# Altium PCB PCB1.PcbDoc (part 3 of 4)
Units mil, origin at the board's own origin, x right, y up, seen from the top; angles counter-clockwise.
Board outline 1280 x 1960 mil, 2 copper layers (Top Layer, Bottom Layer); 39 components, 61 nets, 283 pads, 76 vias.
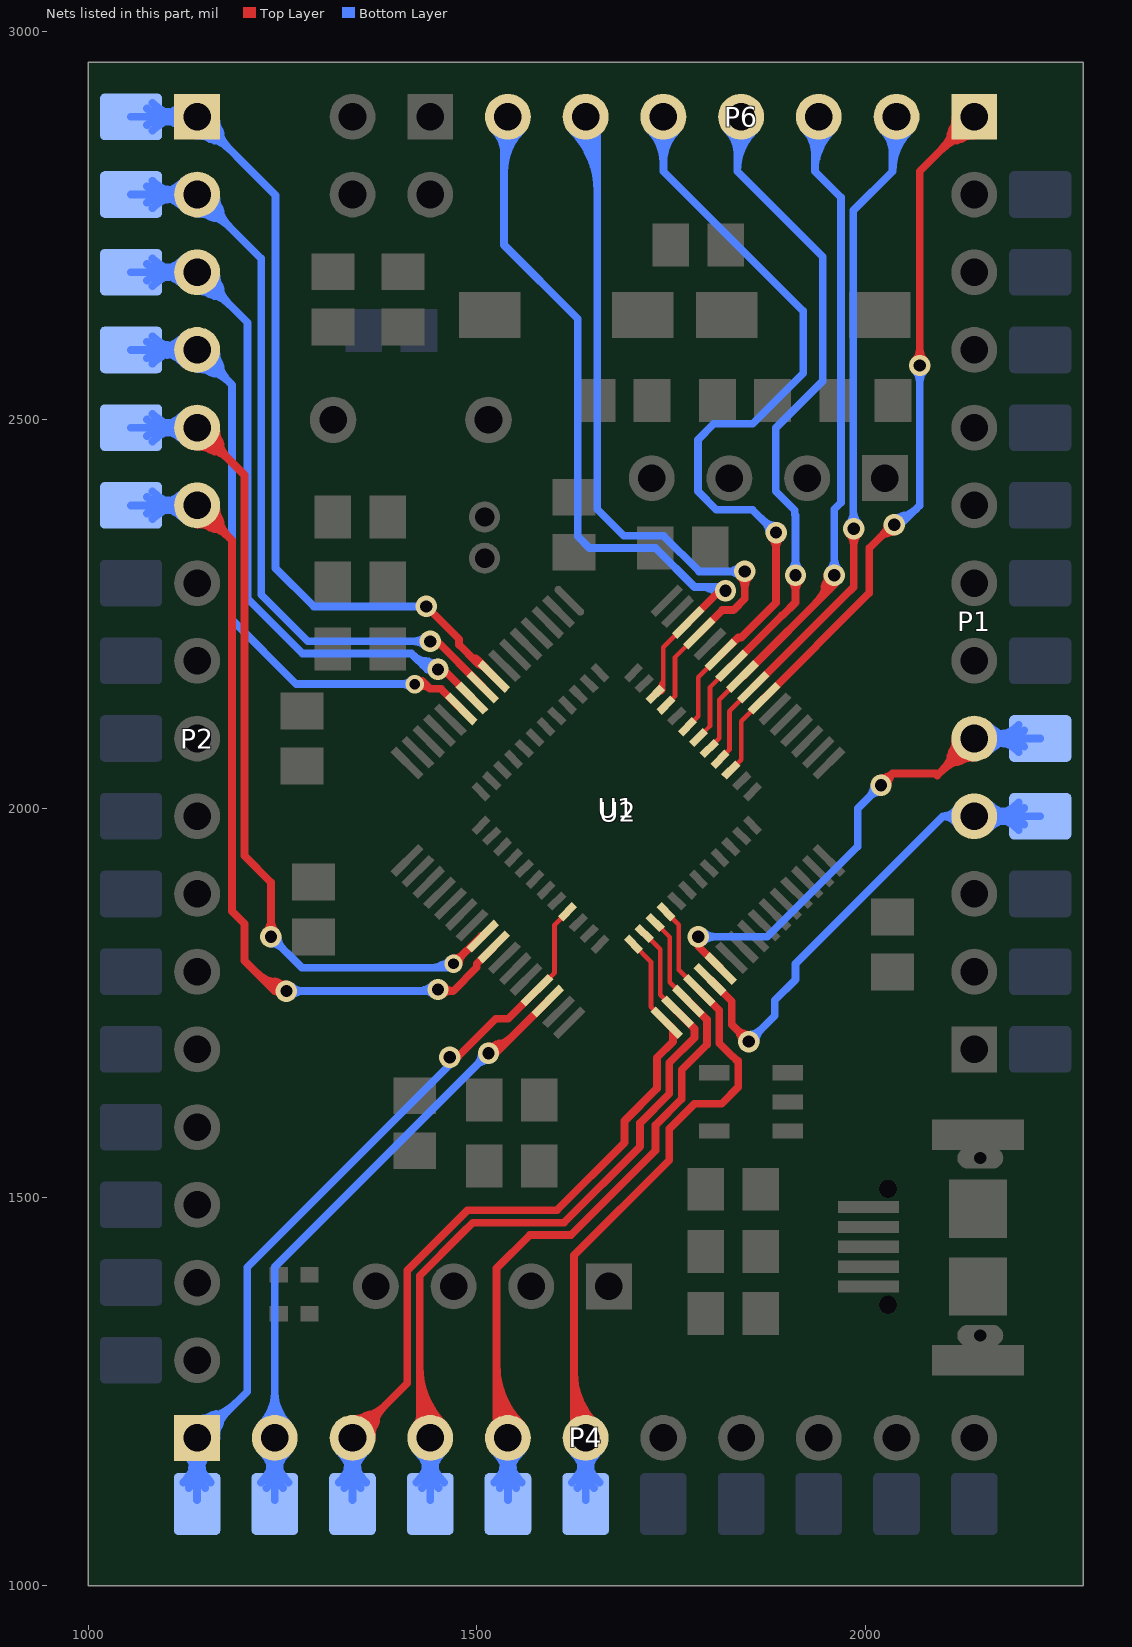
[diagram p3: the nets of this part, all layers, seen from the top]

## Via types
v1: diameter 27.56, hole 15.75, Top Layer to Bottom Layer, tented both sides, 72 vias
v2: diameter 23.62, hole 13.78, Top Layer to Bottom Layer, tented both sides, 4 vias

## Nets (pads, with @x,y where several pads share a name; then routed paths per layer and width w, separated by ;. In a path a pad name is that pad's centre, name@x,y a point inside that pad or via, vN(x,y) a via of type N, cw(c..) or ccw(c..) an arc to the next point about the centre after c; other vN are vias at no path point) (continued)
PB3: P6.1 U1.39 U2.55 | length 1661.6
  Top Layer w6: U1.39@1826.85,2049.41 1840,2062.56 1840,2112.37 U2.55@1869.59,2141.96
  Top Layer w10: U2.55@1869.59,2141.96 2005,2277.37 2005,2335 v1@2035,2365 ; 2026.83,2353.5 ccw(c2022.66,2369.08) v1@2038.17,2364.67 ; v1(2070,2570) 2070,2820 P6.1@2140,2890 ; 2109.48,2867.65 cw(c2146.61,2857.7) P6.1@2138.9,2895.36 ; 2117.65,2859.48 ccw(c2107.7,2896.61) P6.1@2145.36,2888.9 ; 2070,2591.2 cw(c2048.8,2591.2) 2063.79,2576.21 ccw(c2048.8,2591.2) 2070,2591.2 ; 2070,2591.2 ccw(c2091.2,2591.2) 2076.21,2576.21 cw(c2091.2,2591.2) 2070,2591.2 ; 2098.13,2848.13 cw(c2140,2806.26) 2140,2865.47 ccw(c2140,2806.26) 2098.13,2848.13 ; 2098.13,2848.13 ccw(c2056.26,2890) 2115.47,2890 cw(c2056.26,2890) 2098.13,2848.13 ; P6.1@2115.2,2865.2 cw(c2140,2840.4) 2140,2875.47 ccw(c2140,2840.4) P6.1@2115.2,2865.2 ; P6.1@2115.2,2865.2 ccw(c2090.4,2890) 2125.47,2890 cw(c2090.4,2890) P6.1@2115.2,2865.2 ; 2018.6,2348.6 cw(c2037,2330.2) 2037,2356.22 ccw(c2037,2330.2) 2018.6,2348.6 ; 2023.43,2353.43 ccw(c2011.85,2365) 2028.22,2365 cw(c2011.85,2365) 2023.43,2353.43
  Bottom Layer w10: v1@2035,2365 2045,2365 2070,2390 v1(2070,2570) v1@2070,2575 ; v1@2035.9,2365.54 cw(c2056.01,2355.7) 2050.21,2377.32 ; 2070,2548.8 cw(c2091.2,2548.8) 2076.21,2563.79 ccw(c2091.2,2548.8) 2070,2548.8 ; 2070,2548.8 ccw(c2048.8,2548.8) 2063.79,2563.79 cw(c2048.8,2548.8) 2070,2548.8 ; v1@2037,2373.78 ccw(c2037,2414.29) 2065.64,2385.64 cw(c2037,2414.29) v1@2037,2373.78
  other v1: 2037,2365
PB4: P6.2 U1.40 U2.56 | length 1311.1
  Top Layer w6: U1.40@1812.93,2063.33 1825,2075.4 1825,2125.21 U2.56@1855.67,2155.88
  Top Layer w10: U2.56@1855.67,2155.88 1980,2280.21 1980.21,2280.21 1985,2285 v1(1985,2360) ; 1985,2338.8 cw(c2006.2,2338.8) 1991.21,2353.79 ccw(c2006.2,2338.8) 1985,2338.8 ; 1985,2338.8 ccw(c1963.8,2338.8) 1978.79,2353.79 cw(c1963.8,2338.8) 1985,2338.8
  Bottom Layer w10: v1(1985,2360) 1984.47,2360.53 1984.47,2769.47 2035,2820 P6.2@2035,2885 ; v1@1978.79,2366.21 ccw(c1965.08,2379.92) 1984.47,2379.92 cw(c1965.08,2379.92) v1@1978.79,2366.21 ; 1984.47,2382.47 ccw(c2007.47,2382.47) 1991.21,2366.21 cw(c2007.47,2382.47) 1984.47,2382.47 ; P6.2@2022.66,2872.66 cw(c1992.86,2842.86) 2035,2842.86 ccw(c1992.86,2842.86) P6.2@2022.66,2872.66 ; 2035,2819.83 cw(c2108.62,2819.83) 2057.15,2872.46 ccw(c2108.62,2819.83) 2035,2819.83 ; 2035,2843.59 cw(c2085.38,2843.59) 2050.16,2879.61 ccw(c2085.38,2843.59) 2035,2843.59
PB5: P6.3 U1.41 U2.57 | length 1359.7
  Top Layer w6: U1.41@1799.01,2077.25 1812,2090.24 1812,2140.05 U2.57@1841.75,2169.8
  Top Layer w10: U2.57@1841.75,2169.8 v1@1961.95,2290 ; 1947.27,2285.27 cw(c1972.39,2278.53) v1@1959.39,2301.06 ; 1936.56,2264.62 ccw(c1901.18,2300) 1951.22,2300 cw(c1901.18,2300) 1936.56,2264.62 ; 1953.64,2281.69 ccw(c1935.32,2300) 1961.22,2300 cw(c1935.32,2300) 1953.64,2281.69
  Bottom Layer w10: P6.3@1940,2890 1935,2885 1935,2820 1968.47,2786.53 1968.47,2393.47 1960,2385 v1(1960,2300) ; 1960,2321.2 cw(c1938.8,2321.2) 1953.79,2306.21 ccw(c1938.8,2321.2) 1960,2321.2 ; 1960,2321.2 ccw(c1981.2,2321.2) 1966.21,2306.21 cw(c1981.2,2321.2) 1960,2321.2 ; P6.3@1922.66,2872.66 cw(c1892.86,2842.86) 1935,2842.86 ccw(c1892.86,2842.86) P6.3@1922.66,2872.66 ; 1935,2819.83 cw(c2008.62,2819.83) 1957.15,2872.46 ccw(c2008.62,2819.83) 1935,2819.83 ; 1935,2843.59 cw(c1985.38,2843.59) 1950.16,2879.61 ccw(c1985.38,2843.59) 1935,2843.59
PB6: P6.4 U1.42 U2.58 | length 1331.3
  Top Layer w6: U1.42@1785.09,2091.17 1800,2106.08 1800,2155.89 U2.58@1827.83,2183.72
  Top Layer w10: U2.58@1827.83,2183.72 1892.78,2248.67 1893.67,2248.67 1910,2265 v1(1910,2300) ; 1910,2278.8 cw(c1931.2,2278.8) 1916.21,2293.79 ccw(c1931.2,2278.8) 1910,2278.8 ; 1910,2278.8 ccw(c1888.8,2278.8) 1903.79,2293.79 cw(c1888.8,2278.8) 1910,2278.8
  Bottom Layer w10: P6.4@1840,2890 1835,2885 1835,2820 1945,2710 1945,2550 1884.47,2489.47 1884.47,2408.21 1909,2383.69 1909,2378.37 1910,2377.37 v1(1910,2300) ; 1910,2321.2 cw(c1888.8,2321.2) 1903.79,2306.21 ccw(c1888.8,2321.2) 1910,2321.2 ; 1910,2321.2 ccw(c1931.2,2321.2) 1916.21,2306.21 cw(c1931.2,2321.2) 1910,2321.2 ; P6.4@1822.66,2872.66 cw(c1792.86,2842.86) 1835,2842.86 ccw(c1792.86,2842.86) P6.4@1822.66,2872.66 ; 1835,2819.83 cw(c1908.62,2819.83) 1857.15,2872.46 ccw(c1908.62,2819.83) 1835,2819.83 ; 1835,2843.59 cw(c1885.38,2843.59) 1850.16,2879.61 ccw(c1885.38,2843.59) 1835,2843.59
PB7: P6.5 U1.43 U2.59 | length 1479.4
  Top Layer w6: U1.43@1771.17,2105.09 1785,2118.92 1785,2168.73 U2.59@1813.91,2197.64
  Top Layer w10: U2.59@1813.91,2197.64 1836.27,2220 1840.3,2220 1885,2264.7 v1(1885,2355) ; 1885,2333.8 cw(c1906.2,2333.8) 1891.21,2348.79 ccw(c1906.2,2333.8) 1885,2333.8 ; 1885,2333.8 ccw(c1863.8,2333.8) 1878.79,2348.79 cw(c1863.8,2333.8) 1885,2333.8
  Bottom Layer w10: P6.5@1740,2890 1740,2820 1920,2640 1920,2560 1855,2495 1805,2495 1784.47,2474.47 1784.47,2408.21 1808.21,2384.47 1854.57,2384.47 v1@1875,2364.04 ; 1740,2830.79 cw(c1799.21,2830.79) 1757.34,2872.66 ccw(c1799.21,2830.79) 1740,2830.79 ; 1740,2830.79 ccw(c1680.79,2830.79) 1722.66,2872.66 cw(c1680.79,2830.79) 1740,2830.79 ; 1740,2854.93 cw(c1775.07,2854.93) 1750.27,2879.73 ccw(c1775.07,2854.93) 1740,2854.93 ; 1740,2854.93 ccw(c1704.93,2854.93) 1729.73,2879.73 cw(c1704.93,2854.93) 1740,2854.93 ; 1868.38,2370.66 ccw(c1885,2387.28) 1885,2363.78 cw(c1885,2387.28) 1868.38,2370.66 ; 1870.69,2368.35 cw(c1857.33,2355) 1876.22,2355 ccw(c1857.33,2355) 1870.69,2368.35
PB8: P6.6 U1.45 U2.61 | length 1564.2
  Top Layer w6: U1.45@1743.33,2132.93 1755,2144.6 1755,2194.41 U2.61@1786.07,2225.48
  Top Layer w10: U2.61@1786.07,2225.48 1815.81,2255.22 1830.26,2255.22 1844.78,2269.74 v1(1844.78,2305) ; 1844.78,2283.8 cw(c1865.98,2283.8) 1850.99,2298.79 ccw(c1865.98,2283.8) 1844.78,2283.8 ; 1844.78,2283.8 ccw(c1823.58,2283.8) 1838.57,2298.79 cw(c1823.58,2283.8) 1844.78,2283.8
  Bottom Layer w10: P6.6@1640,2890 1655,2875 1655,2385 1689,2351 1740,2351 1786,2305 v1(1844.78,2305) ; P6.6@1642.72,2865.62 cw(c1643.73,2856.58) 1651.62,2861.13 cw(c1657.12,2864.3) P6.6@1653.6,2869.59 ; 1642.78,2857.12 cw(c1656.09,2864.8) P6.6@1647.82,2877.76 ; 1648.01,2848.06 cw(c1661.72,2855.98) P6.6@1653.2,2869.33 ; 1823.58,2305 cw(c1823.58,2283.8) 1838.57,2298.79 ccw(c1823.58,2283.8) 1823.58,2305 ; 1823.58,2305 ccw(c1823.58,2326.2) 1838.57,2311.21 cw(c1823.58,2326.2) 1823.58,2305 ; P6.6@1622.66,2872.66 cw(c1544.57,2794.57) 1655,2794.57 ccw(c1544.57,2794.57) P6.6@1622.66,2872.66 ; P6.6@1629.73,2879.73 cw(c1568.71,2818.71) 1655,2818.71 ccw(c1568.71,2818.71) P6.6@1629.73,2879.73 ; P6.6@1636.8,2886.8 cw(c1592.86,2842.86) 1655,2842.86 ccw(c1592.86,2842.86) P6.6@1636.8,2886.8
PB9: P6.7 U1.46 U2.62 | length 1357.6
  Top Layer w6: U1.46@1729.41,2146.85 1740,2157.44 1740,2207.25 U2.62@1772.15,2239.4 ; U1.46@1736.84,2152.92 cw(c1747.44,2155.76) 1737.93,2161.24 ; U1.46@1733.62,2153.78 ccw(c1718.23,2169.17) 1740,2169.17 cw(c1718.23,2169.17) U1.46@1733.62,2153.78 ; U1.46@1737.87,2149.53 ccw(c1732.71,2154.69) 1740,2154.69 cw(c1732.71,2154.69) U1.46@1737.87,2149.53
  Top Layer w10: U2.62@1772.15,2239.4 1812.75,2280 v1(1820,2280)
  Bottom Layer w10: P6.7@1540,2890 1535,2885 1535,2725.04 1629.78,2630.26 1629.78,2350.22 1645,2335 1730,2335 1780,2285 1815,2285 v1(1820,2280) ; 1535,2842.86 cw(c1587.14,2842.86) 1550.27,2879.73 ccw(c1587.14,2842.86) 1535,2842.86 ; 1535,2842.86 ccw(c1492.86,2842.86) 1522.66,2872.66 cw(c1492.86,2842.86) 1535,2842.86 ; 1535,2818.71 cw(c1611.29,2818.71) 1557.34,2872.66 ccw(c1611.29,2818.71) 1535,2818.71 ; 1786.73,2285 cw(c1786.73,2246.73) 1813.79,2273.79 ccw(c1786.73,2246.73) 1786.73,2285
PB10: P4.1 pad.1@1140,1105 U1.21 U2.29 | length 2257.9
  Top Layer w6: U2.29@1577.28,1766.14 1600,1788.86 1600,1850.4 U1.21@1616.67,1867.07
  Top Layer w10: v1@1475,1680.04 1524.28,1729.32 1540.46,1729.32 U2.29@1577.28,1766.14
  Bottom Layer w10: P4.1@1126.72,1169.38 cw(c1117.93,1155.72) 1133.61,1151.52 cw(c1155.04,1145.78) P4.1@1147.9,1166.78 ; P4.1@1132.1,1166.78 cw(c1124.96,1145.78) 1146.39,1151.52 cw(c1162.07,1155.72) P4.1@1153.28,1169.38 ; P4.1@1134.73,1191.46 cw(c1175.6,1180.16) 1164.63,1221.13 ; pad.1@1140,1110 P4.1@1140,1190 ; P4.1@1140.69,1184.57 ccw(c1136.32,1219.07) 1169.9,1210.07 ; P4.1@1165,1190 1145,1190 1204.55,1249.55 1204.55,1409.55 1440.22,1645.22 ; 1440.26,1645.22 v1@1475,1679.96 ; pad.1@1127.01,1136.36 ccw(c1118.97,1149.56) 1133.9,1153.56 ; pad.1@1127.01,1136.36 ccw(c1118.97,1149.56) 1133.9,1153.56 ; pad.1@1127.01,1136.36 ccw(c1118.97,1149.56) 1133.9,1153.56 ; pad.1@1132.12,1138.73 ccw(c1125.35,1159.12) 1146.1,1153.56 ; pad.1@1132.12,1138.73 ccw(c1125.35,1159.12) 1146.1,1153.56 ; pad.1@1132.12,1138.73 ccw(c1125.35,1159.12) 1146.1,1153.56 ; 1133.9,1153.56 ccw(c1154.65,1159.12) pad.1@1147.88,1138.73 ; 1133.9,1153.56 ccw(c1154.65,1159.12) pad.1@1147.88,1138.73 ; 1133.9,1153.56 ccw(c1154.65,1159.12) pad.1@1147.88,1138.73 ; pad.1@1140,1130.79 cw(c1199.21,1130.79) 1157.34,1172.66 ccw(c1199.21,1130.79) pad.1@1140,1130.79 ; pad.1@1140,1130.79 ccw(c1080.79,1130.79) 1122.66,1172.66 cw(c1080.79,1130.79) pad.1@1140,1130.79 ; 1140,1151.21 cw(c1103.79,1151.21) 1129.39,1125.61 ccw(c1103.79,1151.21) 1140,1151.21 ; 1140,1151.21 ccw(c1176.21,1151.21) 1150.61,1125.61 cw(c1176.21,1151.21) 1140,1151.21 ; 1140,1154.93 cw(c1175.07,1154.93) 1150.27,1179.73 ccw(c1175.07,1154.93) 1140,1154.93 ; 1140,1154.93 ccw(c1104.93,1154.93) 1129.73,1179.73 cw(c1104.93,1154.93) 1140,1154.93 ; P4.1@1140,1175.36 cw(c1079.64,1175.36) 1122.32,1132.68 ccw(c1079.64,1175.36) P4.1@1140,1175.36 ; P4.1@1140,1175.36 ccw(c1200.36,1175.36) 1157.68,1132.68 cw(c1200.36,1175.36) P4.1@1140,1175.36 ; 1146.1,1153.56 ccw(c1161.03,1149.56) pad.1@1152.99,1136.36 ; 1146.1,1153.56 ccw(c1161.03,1149.56) pad.1@1152.99,1136.36 ; 1146.1,1153.56 ccw(c1161.03,1149.56) pad.1@1152.99,1136.36 ; P4.1@1140,1204.53 ccw(c1140,1251.67) 1173.34,1218.34 cw(c1140,1251.67) P4.1@1140,1204.53 ; P4.1@1140,1214.53 ccw(c1140,1285.81) 1190.41,1235.41 cw(c1140,1285.81) P4.1@1140,1214.53 ; P4.1@1164.53,1190 cw(c1211.67,1190) 1178.34,1223.34 ccw(c1211.67,1190) P4.1@1164.53,1190
  other v1: 1465,1680
PB11: P4.2 pad.1@1240,1105 U2.30 | length 2227.8
  Top Layer w10: v1@1513.92,1685.56 cw(c1534.8,1674.73) 1528.71,1697.45 ; v1(1515,1685) 1523.98,1685 U2.30@1591.2,1752.22 ; v1@1515,1683.78 ccw(c1515,1702.51) 1528.25,1689.27 cw(c1515,1702.51) v1@1515,1683.78 ; v1@1515,1693.78 ccw(c1515,1736.65) 1545.32,1706.34 cw(c1515,1736.65) v1@1515,1693.78
  Bottom Layer w10: P4.2@1226.72,1169.38 cw(c1217.93,1155.72) 1233.61,1151.52 cw(c1255.04,1145.78) P4.2@1247.9,1166.78 ; P4.2@1232.1,1166.78 cw(c1224.96,1145.78) 1246.39,1151.52 cw(c1262.07,1155.72) P4.2@1253.28,1169.38 ; pad.1@1240,1110 P4.2@1240,1190 1240,1410 v1(1515,1685) ; P4.2@1245,1190 P4.2@1245,1215 ; pad.1@1227.01,1136.36 ccw(c1218.97,1149.56) 1233.9,1153.56 ; pad.1@1227.01,1136.36 ccw(c1218.97,1149.56) 1233.9,1153.56 ; pad.1@1227.01,1136.36 ccw(c1218.97,1149.56) 1233.9,1153.56 ; pad.1@1232.12,1138.73 ccw(c1225.35,1159.12) 1246.1,1153.56 ; pad.1@1232.12,1138.73 ccw(c1225.35,1159.12) 1246.1,1153.56 ; pad.1@1232.12,1138.73 ccw(c1225.35,1159.12) 1246.1,1153.56 ; 1233.9,1153.56 ccw(c1254.65,1159.12) pad.1@1247.88,1138.73 ; 1233.9,1153.56 ccw(c1254.65,1159.12) pad.1@1247.88,1138.73 ; 1233.9,1153.56 ccw(c1254.65,1159.12) pad.1@1247.88,1138.73 ; pad.1@1240,1130.79 cw(c1299.21,1130.79) 1257.34,1172.66 ccw(c1299.21,1130.79) pad.1@1240,1130.79 ; pad.1@1240,1130.79 ccw(c1180.79,1130.79) 1222.66,1172.66 cw(c1180.79,1130.79) pad.1@1240,1130.79 ; 1240,1151.21 cw(c1203.79,1151.21) 1229.39,1125.61 ccw(c1203.79,1151.21) 1240,1151.21 ; 1240,1151.21 ccw(c1276.21,1151.21) 1250.61,1125.61 cw(c1276.21,1151.21) 1240,1151.21 ; 1240,1154.93 cw(c1275.07,1154.93) 1250.27,1179.73 ccw(c1275.07,1154.93) 1240,1154.93 ; 1240,1154.93 ccw(c1204.93,1154.93) 1229.73,1179.73 cw(c1204.93,1154.93) 1240,1154.93 ; P4.2@1240,1175.36 cw(c1179.64,1175.36) 1222.32,1132.68 ccw(c1179.64,1175.36) P4.2@1240,1175.36 ; P4.2@1240,1175.36 ccw(c1300.36,1175.36) 1257.68,1132.68 cw(c1300.36,1175.36) P4.2@1240,1175.36 ; 1240,1225.07 cw(c1204.93,1225.07) 1229.73,1200.27 ccw(c1204.93,1225.07) 1240,1225.07 ; 1240,1225.07 ccw(c1275.07,1225.07) 1250.27,1200.27 cw(c1275.07,1225.07) 1240,1225.07 ; 1240,1249.21 cw(c1180.79,1249.21) 1222.66,1207.34 ccw(c1180.79,1249.21) 1240,1249.21 ; 1240,1249.21 ccw(c1299.21,1249.21) 1257.34,1207.34 cw(c1299.21,1249.21) 1240,1249.21 ; 1246.1,1153.56 ccw(c1261.03,1149.56) pad.1@1252.99,1136.36 ; 1246.1,1153.56 ccw(c1261.03,1149.56) pad.1@1252.99,1136.36 ; 1246.1,1153.56 ccw(c1261.03,1149.56) pad.1@1252.99,1136.36 ; 1500.01,1670.01 cw(c1515,1655.02) 1515,1676.22 ccw(c1515,1655.02) 1500.01,1670.01 ; 1500.01,1670.01 ccw(c1485.02,1685) 1506.22,1685 cw(c1485.02,1685) 1500.01,1670.01
PB12: P4.3 pad.1@1340,1105 U1.25 U2.33 | length 2286.5
  Top Layer w6: U1.25@1701.58,1825.31 1724,1802.89 1724,1744.69 U2.33@1744.31,1724.38
  Top Layer w10: P4.3@1334.64,1191.1 cw(c1372.3,1183.39) 1362.35,1220.52 ; P4.3@1340,1190 1410.53,1260.53 1410.53,1405.53 1488,1483 1603,1483 1690,1570 1690,1597.88 1731.69,1639.57 1731.69,1679.31 1752.37,1700 1752.37,1716.32 U2.33@1744.31,1724.38 ; P4.3@1341.1,1184.64 ccw(c1333.39,1222.3) 1370.52,1212.35 ; 1364.8,1214.8 cw(c1340,1239.6) 1340,1204.53 ccw(c1340,1239.6) 1364.8,1214.8 ; 1364.8,1214.8 ccw(c1389.6,1190) 1354.53,1190 cw(c1389.6,1190) 1364.8,1214.8 ; 1381.87,1231.87 cw(c1340,1273.74) 1340,1214.53 ccw(c1340,1273.74) 1381.87,1231.87 ; 1381.87,1231.87 ccw(c1423.74,1190) 1364.53,1190 cw(c1423.74,1190) 1381.87,1231.87
  Bottom Layer w10: P4.3@1326.72,1169.38 cw(c1317.93,1155.72) 1333.61,1151.52 cw(c1355.04,1145.78) P4.3@1347.9,1166.78 ; P4.3@1332.1,1166.78 cw(c1324.96,1145.78) 1346.39,1151.52 cw(c1362.07,1155.72) P4.3@1353.28,1169.38 ; pad.1@1340,1110 P4.3@1340,1190 ; pad.1@1327.01,1136.36 ccw(c1318.97,1149.56) 1333.9,1153.56 ; pad.1@1327.01,1136.36 ccw(c1318.97,1149.56) 1333.9,1153.56 ; pad.1@1327.01,1136.36 ccw(c1318.97,1149.56) 1333.9,1153.56 ; pad.1@1332.12,1138.73 ccw(c1325.35,1159.12) 1346.1,1153.56 ; pad.1@1332.12,1138.73 ccw(c1325.35,1159.12) 1346.1,1153.56 ; pad.1@1332.12,1138.73 ccw(c1325.35,1159.12) 1346.1,1153.56 ; 1333.9,1153.56 ccw(c1354.65,1159.12) pad.1@1347.88,1138.73 ; 1333.9,1153.56 ccw(c1354.65,1159.12) pad.1@1347.88,1138.73 ; 1333.9,1153.56 ccw(c1354.65,1159.12) pad.1@1347.88,1138.73 ; pad.1@1340,1130.79 cw(c1399.21,1130.79) 1357.34,1172.66 ccw(c1399.21,1130.79) pad.1@1340,1130.79 ; pad.1@1340,1130.79 ccw(c1280.79,1130.79) 1322.66,1172.66 cw(c1280.79,1130.79) pad.1@1340,1130.79 ; 1340,1151.21 cw(c1303.79,1151.21) 1329.39,1125.61 ccw(c1303.79,1151.21) 1340,1151.21 ; 1340,1151.21 ccw(c1376.21,1151.21) 1350.61,1125.61 cw(c1376.21,1151.21) 1340,1151.21 ; 1340,1154.93 cw(c1375.07,1154.93) 1350.27,1179.73 ccw(c1375.07,1154.93) 1340,1154.93 ; 1340,1154.93 ccw(c1304.93,1154.93) 1329.73,1179.73 cw(c1304.93,1154.93) 1340,1154.93 ; P4.3@1340,1175.36 cw(c1279.64,1175.36) 1322.32,1132.68 ccw(c1279.64,1175.36) P4.3@1340,1175.36 ; P4.3@1340,1175.36 ccw(c1400.36,1175.36) 1357.68,1132.68 cw(c1400.36,1175.36) P4.3@1340,1175.36 ; 1346.1,1153.56 ccw(c1361.03,1149.56) pad.1@1352.99,1136.36 ; 1346.1,1153.56 ccw(c1361.03,1149.56) pad.1@1352.99,1136.36 ; 1346.1,1153.56 ccw(c1361.03,1149.56) pad.1@1352.99,1136.36
PB13: P4.4 pad.1@1440,1105 U1.26 U2.34 | length 2314.4
  Top Layer w6: U1.26@1715.49,1839.23 1736,1818.72 1736,1760.53 U2.34@1758.23,1738.3
  Top Layer w10: P4.4@1446.53,1191.53 1445,1190 1426.53,1208.47 1426.53,1398.84 1481.34,1453.66 1481.34,1453.72 1494.63,1467 1612,1467 1709.87,1564.87 1709.87,1595.13 1747.69,1632.94 1747.69,1672.69 1780,1705 1780,1716.53 U2.34@1758.23,1738.3 ; P4.4@1422.66,1207.34 ccw(c1413.31,1216.69) 1426.53,1216.69 cw(c1413.31,1216.69) P4.4@1422.66,1207.34 ; 1426.53,1233.46 ccw(c1483.46,1233.46) 1443.2,1193.2 cw(c1483.46,1233.46) 1426.53,1233.46 ; 1426.53,1257.6 ccw(c1507.6,1257.6) 1450.27,1200.27 cw(c1507.6,1257.6) 1426.53,1257.6 ; 1426.53,1281.74 ccw(c1531.74,1281.74) 1457.34,1207.34 cw(c1531.74,1281.74) 1426.53,1281.74
  Bottom Layer w10: P4.4@1426.72,1169.38 cw(c1417.93,1155.72) 1433.61,1151.52 cw(c1455.04,1145.78) P4.4@1447.9,1166.78 ; P4.4@1432.1,1166.78 cw(c1424.96,1145.78) 1446.39,1151.52 cw(c1462.07,1155.72) P4.4@1453.28,1169.38 ; pad.1@1440,1110 P4.4@1440,1190 ; pad.1@1427.01,1136.36 ccw(c1418.97,1149.56) 1433.9,1153.56 ; pad.1@1427.01,1136.36 ccw(c1418.97,1149.56) 1433.9,1153.56 ; pad.1@1427.01,1136.36 ccw(c1418.97,1149.56) 1433.9,1153.56 ; pad.1@1432.12,1138.73 ccw(c1425.35,1159.12) 1446.1,1153.56 ; pad.1@1432.12,1138.73 ccw(c1425.35,1159.12) 1446.1,1153.56 ; pad.1@1432.12,1138.73 ccw(c1425.35,1159.12) 1446.1,1153.56 ; 1433.9,1153.56 ccw(c1454.65,1159.12) pad.1@1447.88,1138.73 ; 1433.9,1153.56 ccw(c1454.65,1159.12) pad.1@1447.88,1138.73 ; 1433.9,1153.56 ccw(c1454.65,1159.12) pad.1@1447.88,1138.73 ; pad.1@1440,1130.79 cw(c1499.21,1130.79) 1457.34,1172.66 ccw(c1499.21,1130.79) pad.1@1440,1130.79 ; pad.1@1440,1130.79 ccw(c1380.79,1130.79) 1422.66,1172.66 cw(c1380.79,1130.79) pad.1@1440,1130.79 ; 1440,1151.21 cw(c1403.79,1151.21) 1429.39,1125.61 ccw(c1403.79,1151.21) 1440,1151.21 ; 1440,1151.21 ccw(c1476.21,1151.21) 1450.61,1125.61 cw(c1476.21,1151.21) 1440,1151.21 ; 1440,1154.93 cw(c1475.07,1154.93) 1450.27,1179.73 ccw(c1475.07,1154.93) 1440,1154.93 ; 1440,1154.93 ccw(c1404.93,1154.93) 1429.73,1179.73 cw(c1404.93,1154.93) 1440,1154.93 ; P4.4@1440,1175.36 cw(c1379.64,1175.36) 1422.32,1132.68 ccw(c1379.64,1175.36) P4.4@1440,1175.36 ; P4.4@1440,1175.36 ccw(c1500.36,1175.36) 1457.68,1132.68 cw(c1500.36,1175.36) P4.4@1440,1175.36 ; 1446.1,1153.56 ccw(c1461.03,1149.56) pad.1@1452.99,1136.36 ; 1446.1,1153.56 ccw(c1461.03,1149.56) pad.1@1452.99,1136.36 ; 1446.1,1153.56 ccw(c1461.03,1149.56) pad.1@1452.99,1136.36
PB14: P4.5 pad.1@1540,1105 U1.27 U2.35 | length 2318.5
  Top Layer w6: U1.27@1729.41,1853.15 1748,1834.56 1748,1776.37 U2.35@1772.15,1752.22
  Top Layer w10: P4.5@1526.71,1210.62 ccw(c1523.54,1215.54) 1528.61,1218.47 ccw(c1535.89,1222.67) P4.5@1536.94,1214.34 ; P4.5@1527.04,1210.82 ccw(c1518.93,1223.86) 1532.22,1231.53 ; P4.5@1532.32,1202.33 ccw(c1524.4,1215.08) 1537.39,1222.58 ; P4.5@1540,1190 1525.26,1204.74 1525.26,1408.26 1568,1451 1621,1451 1730,1560 1730,1592.63 1763.69,1626.31 1763.69,1663.69 1796,1696 1796,1728.37 U2.35@1772.15,1752.22 ; 1525.26,1236.51 ccw(c1586.51,1236.51) 1543.2,1193.2 cw(c1586.51,1236.51) 1525.26,1236.51 ; 1525.26,1260.65 ccw(c1610.65,1260.65) 1550.27,1200.27 cw(c1610.65,1260.65) 1525.26,1260.65 ; 1525.26,1284.79 ccw(c1634.79,1284.79) 1557.34,1207.34 cw(c1634.79,1284.79) 1525.26,1284.79
  Bottom Layer w10: P4.5@1526.72,1169.38 cw(c1517.93,1155.72) 1533.61,1151.52 cw(c1555.04,1145.78) P4.5@1547.9,1166.78 ; P4.5@1532.1,1166.78 cw(c1524.96,1145.78) 1546.39,1151.52 cw(c1562.07,1155.72) P4.5@1553.28,1169.38 ; pad.1@1540,1110 P4.5@1540,1190 ; pad.1@1527.01,1136.36 ccw(c1518.97,1149.56) 1533.9,1153.56 ; pad.1@1527.01,1136.36 ccw(c1518.97,1149.56) 1533.9,1153.56 ; pad.1@1527.01,1136.36 ccw(c1518.97,1149.56) 1533.9,1153.56 ; pad.1@1532.12,1138.73 ccw(c1525.35,1159.12) 1546.1,1153.56 ; pad.1@1532.12,1138.73 ccw(c1525.35,1159.12) 1546.1,1153.56 ; pad.1@1532.12,1138.73 ccw(c1525.35,1159.12) 1546.1,1153.56 ; 1533.9,1153.56 ccw(c1554.65,1159.12) pad.1@1547.88,1138.73 ; 1533.9,1153.56 ccw(c1554.65,1159.12) pad.1@1547.88,1138.73 ; 1533.9,1153.56 ccw(c1554.65,1159.12) pad.1@1547.88,1138.73 ; pad.1@1540,1130.79 cw(c1599.21,1130.79) 1557.34,1172.66 ccw(c1599.21,1130.79) pad.1@1540,1130.79 ; pad.1@1540,1130.79 ccw(c1480.79,1130.79) 1522.66,1172.66 cw(c1480.79,1130.79) pad.1@1540,1130.79 ; 1540,1151.21 cw(c1503.79,1151.21) 1529.39,1125.61 ccw(c1503.79,1151.21) 1540,1151.21 ; 1540,1151.21 ccw(c1576.21,1151.21) 1550.61,1125.61 cw(c1576.21,1151.21) 1540,1151.21 ; 1540,1154.93 cw(c1575.07,1154.93) 1550.27,1179.73 ccw(c1575.07,1154.93) 1540,1154.93 ; 1540,1154.93 ccw(c1504.93,1154.93) 1529.73,1179.73 cw(c1504.93,1154.93) 1540,1154.93 ; P4.5@1540,1175.36 cw(c1479.64,1175.36) 1522.32,1132.68 ccw(c1479.64,1175.36) P4.5@1540,1175.36 ; P4.5@1540,1175.36 ccw(c1600.36,1175.36) 1557.68,1132.68 cw(c1600.36,1175.36) P4.5@1540,1175.36 ; 1546.1,1153.56 ccw(c1561.03,1149.56) pad.1@1552.99,1136.36 ; 1546.1,1153.56 ccw(c1561.03,1149.56) pad.1@1552.99,1136.36 ; 1546.1,1153.56 ccw(c1561.03,1149.56) pad.1@1552.99,1136.36
PB15: P4.6 pad.1@1640,1105 U1.28 U2.36 | length 2089.6
  Top Layer w6: U1.28@1743.33,1867.07 1760,1850.4 1760,1792.21 U2.36@1786.07,1766.14
  Top Layer w10: 1625,1275 ccw(c1720.16,1275) P4.6@1652.87,1207.71 ; 1629.2,1240.22 ccw(c1700.22,1240.22) P4.6@1650,1190 ; P4.6@1634.7,1204.84 P4.6@1629.47,1210.07 ; P4.6@1640,1190 1629.47,1200.53 P4.6@1629.47,1210.07 ; U2.36@1786.07,1766.14 1812,1740.21 1812,1698 1829.35,1680.65 1829.75,1680.65 1835.4,1675 1836.5,1675 1836.5,1641.5 1815,1620 1780,1620 1747.5,1587.5 1747.5,1547.5 1625,1425 1625,1214.54 P4.6@1629.47,1210.07 ; P4.6@1622.66,1207.34 ccw(c1606.2,1223.8) 1629.47,1223.8 cw(c1606.2,1223.8) P4.6@1622.66,1207.34 ; 1629.47,1226.35 ccw(c1676.35,1226.35) 1643.2,1193.2 cw(c1676.35,1226.35) 1629.47,1226.35
  Bottom Layer w10: P4.6@1626.72,1169.38 cw(c1617.93,1155.72) 1633.61,1151.52 cw(c1655.04,1145.78) P4.6@1647.9,1166.78 ; P4.6@1632.1,1166.78 cw(c1624.96,1145.78) 1646.39,1151.52 cw(c1662.07,1155.72) P4.6@1653.28,1169.38 ; pad.1@1640,1110 P4.6@1640,1190 ; pad.1@1627.01,1136.36 ccw(c1618.97,1149.56) 1633.9,1153.56 ; pad.1@1627.01,1136.36 ccw(c1618.97,1149.56) 1633.9,1153.56 ; pad.1@1627.01,1136.36 ccw(c1618.97,1149.56) 1633.9,1153.56 ; pad.1@1632.12,1138.73 ccw(c1625.35,1159.12) 1646.1,1153.56 ; pad.1@1632.12,1138.73 ccw(c1625.35,1159.12) 1646.1,1153.56 ; pad.1@1632.12,1138.73 ccw(c1625.35,1159.12) 1646.1,1153.56 ; 1633.9,1153.56 ccw(c1654.65,1159.12) pad.1@1647.88,1138.73 ; 1633.9,1153.56 ccw(c1654.65,1159.12) pad.1@1647.88,1138.73 ; 1633.9,1153.56 ccw(c1654.65,1159.12) pad.1@1647.88,1138.73 ; pad.1@1640,1130.79 cw(c1699.21,1130.79) 1657.34,1172.66 ccw(c1699.21,1130.79) pad.1@1640,1130.79 ; pad.1@1640,1130.79 ccw(c1580.79,1130.79) 1622.66,1172.66 cw(c1580.79,1130.79) pad.1@1640,1130.79 ; 1640,1151.21 cw(c1603.79,1151.21) 1629.39,1125.61 ccw(c1603.79,1151.21) 1640,1151.21 ; 1640,1151.21 ccw(c1676.21,1151.21) 1650.61,1125.61 cw(c1676.21,1151.21) 1640,1151.21 ; 1640,1154.93 cw(c1675.07,1154.93) 1650.27,1179.73 ccw(c1675.07,1154.93) 1640,1154.93 ; 1640,1154.93 ccw(c1604.93,1154.93) 1629.73,1179.73 cw(c1604.93,1154.93) 1640,1154.93 ; P4.6@1640,1175.36 cw(c1579.64,1175.36) 1622.32,1132.68 ccw(c1579.64,1175.36) P4.6@1640,1175.36 ; P4.6@1640,1175.36 ccw(c1700.36,1175.36) 1657.68,1132.68 cw(c1700.36,1175.36) P4.6@1640,1175.36 ; 1646.1,1153.56 ccw(c1661.03,1149.56) pad.1@1652.99,1136.36 ; 1646.1,1153.56 ccw(c1661.03,1149.56) pad.1@1652.99,1136.36 ; 1646.1,1153.56 ccw(c1661.03,1149.56) pad.1@1652.99,1136.36
PC0: P2.1 pad.1@1055,2890 U2.8 | length 2423.2
  Top Layer w10: v1(1435,2260) 1477.19,2217.81 1477.19,2210.52 ; 1477.71,2210 1477.19,2210.52 ; 1498.09,2193.31 U2.8@1521.6,2169.8 1501.27,2191.15 ; 1498.86,2188.86 1477.19,2210.52 ; 1501.17,2186.55 ccw(c1507.46,2192.84) U2.8@1507.46,2183.94 ; 1501.17,2186.55 ccw(c1507.46,2192.84) U2.8@1507.46,2183.94 ; 1501.17,2186.55 ccw(c1507.46,2192.84) U2.8@1507.46,2183.94 ; 1501.17,2186.55 ccw(c1507.46,2192.84) U2.8@1507.46,2183.94
  Bottom Layer w10: pad.1@1055,2890 P2.1@1140,2890 1241,2789 1241,2309 1290,2260 v1(1435,2260) ; P2.1@1116.78,2882.1 ccw(c1095.78,2874.96) 1101.52,2896.39 ccw(c1105.72,2912.07) P2.1@1119.38,2903.28 ; P2.1@1116.78,2897.9 cw(c1095.78,2905.04) 1101.52,2883.61 cw(c1105.72,2867.93) P2.1@1119.38,2876.72 ; P2.1@1134.64,2888.9 ccw(c1172.3,2896.61) 1162.35,2859.48 ; P2.1@1141.1,2895.36 cw(c1133.39,2857.7) 1170.52,2867.65 ; pad.1@1080.79,2890 cw(c1080.79,2830.79) 1122.66,2872.66 ccw(c1080.79,2830.79) pad.1@1080.79,2890 ; pad.1@1080.79,2890 ccw(c1080.79,2949.21) 1122.66,2907.34 cw(c1080.79,2949.21) pad.1@1080.79,2890 ; pad.1@1086.36,2877.01 cw(c1099.56,2868.97) 1103.56,2883.9 ; pad.1@1086.36,2877.01 cw(c1099.56,2868.97) 1103.56,2883.9 ; pad.1@1086.36,2877.01 cw(c1099.56,2868.97) 1103.56,2883.9 ; pad.1@1086.36,2902.99 ccw(c1099.56,2911.03) 1103.56,2896.1 ; pad.1@1086.36,2902.99 ccw(c1099.56,2911.03) 1103.56,2896.1 ; pad.1@1086.36,2902.99 ccw(c1099.56,2911.03) 1103.56,2896.1 ; pad.1@1088.73,2882.12 cw(c1109.12,2875.35) 1103.56,2896.1 ; pad.1@1088.73,2882.12 cw(c1109.12,2875.35) 1103.56,2896.1 ; pad.1@1088.73,2882.12 cw(c1109.12,2875.35) 1103.56,2896.1 ; pad.1@1088.73,2897.88 ccw(c1109.12,2904.65) 1103.56,2883.9 ; pad.1@1088.73,2897.88 ccw(c1109.12,2904.65) 1103.56,2883.9 ; pad.1@1088.73,2897.88 ccw(c1109.12,2904.65) 1103.56,2883.9 ; 1101.21,2890 cw(c1101.21,2926.21) 1075.61,2900.61 ccw(c1101.21,2926.21) 1101.21,2890 ; 1101.21,2890 ccw(c1101.21,2853.79) 1075.61,2879.39 cw(c1101.21,2853.79) 1101.21,2890 ; 1104.93,2890 cw(c1104.93,2854.93) 1129.73,2879.73 ccw(c1104.93,2854.93) 1104.93,2890 ; 1104.93,2890 ccw(c1104.93,2925.07) 1129.73,2900.27 cw(c1104.93,2925.07) 1104.93,2890 ; P2.1@1125.36,2890 cw(c1125.36,2950.36) 1082.68,2907.68 ccw(c1125.36,2950.36) P2.1@1125.36,2890 ; P2.1@1125.36,2890 ccw(c1125.36,2829.64) 1082.68,2872.32 cw(c1125.36,2829.64) P2.1@1125.36,2890 ; P2.1@1164.8,2865.2 cw(c1189.6,2890) 1154.53,2890 ccw(c1189.6,2890) P2.1@1164.8,2865.2 ; P2.1@1164.8,2865.2 ccw(c1140,2840.4) 1140,2875.47 cw(c1140,2840.4) P2.1@1164.8,2865.2 ; 1181.87,2848.13 cw(c1223.74,2890) 1164.53,2890 ccw(c1223.74,2890) 1181.87,2848.13 ; 1181.87,2848.13 ccw(c1140,2806.26) 1140,2865.47 cw(c1140,2806.26) 1181.87,2848.13
PC1: P2.2 pad.1@1055,2790 U2.9 | length 2334.5
  Top Layer w10: v1@1444.49,2219.49 1507.68,2156.3 U2.9@1507.68,2155.88
  Bottom Layer w10: pad.1@1055,2790 P2.2@1140,2790 1222.5,2707.5 1222.5,2275.13 1282.41,2215.22 v1@1429.78,2215.22 ; P2.2@1116.78,2782.1 ccw(c1095.78,2774.96) 1101.52,2796.39 ccw(c1105.72,2812.07) P2.2@1119.38,2803.28 ; P2.2@1116.78,2797.9 cw(c1095.78,2805.04) 1101.52,2783.61 cw(c1105.72,2767.93) P2.2@1119.38,2776.72 ; P2.2@1134.64,2788.9 ccw(c1172.3,2796.61) 1162.35,2759.48 ; P2.2@1141.1,2795.36 cw(c1133.39,2757.7) 1170.52,2767.65 ; pad.1@1080.79,2790 cw(c1080.79,2730.79) 1122.66,2772.66 ccw(c1080.79,2730.79) pad.1@1080.79,2790 ; pad.1@1080.79,2790 ccw(c1080.79,2849.21) 1122.66,2807.34 cw(c1080.79,2849.21) pad.1@1080.79,2790 ; pad.1@1086.36,2777.01 cw(c1099.56,2768.97) 1103.56,2783.9 ; pad.1@1086.36,2777.01 cw(c1099.56,2768.97) 1103.56,2783.9 ; pad.1@1086.36,2777.01 cw(c1099.56,2768.97) 1103.56,2783.9 ; pad.1@1086.36,2802.99 ccw(c1099.56,2811.03) 1103.56,2796.1 ; pad.1@1086.36,2802.99 ccw(c1099.56,2811.03) 1103.56,2796.1 ; pad.1@1086.36,2802.99 ccw(c1099.56,2811.03) 1103.56,2796.1 ; pad.1@1088.73,2782.12 cw(c1109.12,2775.35) 1103.56,2796.1 ; pad.1@1088.73,2782.12 cw(c1109.12,2775.35) 1103.56,2796.1 ; pad.1@1088.73,2782.12 cw(c1109.12,2775.35) 1103.56,2796.1 ; pad.1@1088.73,2797.88 ccw(c1109.12,2804.65) 1103.56,2783.9 ; pad.1@1088.73,2797.88 ccw(c1109.12,2804.65) 1103.56,2783.9 ; pad.1@1088.73,2797.88 ccw(c1109.12,2804.65) 1103.56,2783.9 ; 1101.21,2790 cw(c1101.21,2826.21) 1075.61,2800.61 ccw(c1101.21,2826.21) 1101.21,2790 ; 1101.21,2790 ccw(c1101.21,2753.79) 1075.61,2779.39 cw(c1101.21,2753.79) 1101.21,2790 ; 1104.93,2790 cw(c1104.93,2754.93) 1129.73,2779.73 ccw(c1104.93,2754.93) 1104.93,2790 ; 1104.93,2790 ccw(c1104.93,2825.07) 1129.73,2800.27 cw(c1104.93,2825.07) 1104.93,2790 ; P2.2@1125.36,2790 cw(c1125.36,2850.36) 1082.68,2807.68 ccw(c1125.36,2850.36) P2.2@1125.36,2790 ; P2.2@1125.36,2790 ccw(c1125.36,2729.64) 1082.68,2772.32 cw(c1125.36,2729.64) P2.2@1125.36,2790 ; 1164.8,2765.2 cw(c1189.6,2790) 1154.53,2790 ccw(c1189.6,2790) 1164.8,2765.2 ; 1164.8,2765.2 ccw(c1140,2740.4) 1140,2775.47 cw(c1140,2740.4) 1164.8,2765.2 ; 1181.87,2748.13 cw(c1223.74,2790) 1164.53,2790 ccw(c1223.74,2790) 1181.87,2748.13 ; 1181.87,2748.13 ccw(c1140,2706.26) 1140,2765.47 cw(c1140,2706.26) 1181.87,2748.13 ; 1418.27,2215.22 cw(c1418.27,2193.27) 1433.79,2208.79 ccw(c1418.27,2193.27) 1418.27,2215.22 ; 1419.34,2215.22 ccw(c1419.34,2235.66) 1433.79,2221.21 cw(c1419.34,2235.66) 1419.34,2215.22
  other v1: 1440,2215
PC2: P2.3 pad.1@1055,2690 U2.10 | length 2345.4
  Top Layer w10: v1@1456.79,2178.94 U2.10@1493.76,2141.96
  Bottom Layer w10: pad.1@1055,2690 P2.3@1140,2690 1205,2625 1205,2270 1275.78,2199.22 1415.78,2199.22 ; P2.3@1116.78,2682.1 ccw(c1095.78,2674.96) 1101.52,2696.39 ccw(c1105.72,2712.07) P2.3@1119.38,2703.28 ; P2.3@1116.78,2697.9 cw(c1095.78,2705.04) 1101.52,2683.61 cw(c1105.72,2667.93) P2.3@1119.38,2676.72 ; P2.3@1134.64,2688.9 ccw(c1172.3,2696.61) 1162.35,2659.48 ; P2.3@1141.1,2695.36 cw(c1133.39,2657.7) 1170.52,2667.65 ; 1433.9,2189.88 cw(c1430.1,2164.15) v1@1450.98,2179.66 ; v1(1450,2178.94) 1436.06,2178.94 ; pad.1@1080.79,2690 cw(c1080.79,2630.79) 1122.66,2672.66 ccw(c1080.79,2630.79) pad.1@1080.79,2690 ; pad.1@1080.79,2690 ccw(c1080.79,2749.21) 1122.66,2707.34 cw(c1080.79,2749.21) pad.1@1080.79,2690 ; pad.1@1086.36,2677.01 cw(c1099.56,2668.97) 1103.56,2683.9 ; pad.1@1086.36,2677.01 cw(c1099.56,2668.97) 1103.56,2683.9 ; pad.1@1086.36,2677.01 cw(c1099.56,2668.97) 1103.56,2683.9 ; pad.1@1086.36,2702.99 ccw(c1099.56,2711.03) 1103.56,2696.1 ; pad.1@1086.36,2702.99 ccw(c1099.56,2711.03) 1103.56,2696.1 ; pad.1@1086.36,2702.99 ccw(c1099.56,2711.03) 1103.56,2696.1 ; pad.1@1088.73,2682.12 cw(c1109.12,2675.35) 1103.56,2696.1 ; pad.1@1088.73,2682.12 cw(c1109.12,2675.35) 1103.56,2696.1 ; pad.1@1088.73,2682.12 cw(c1109.12,2675.35) 1103.56,2696.1 ; pad.1@1088.73,2697.88 ccw(c1109.12,2704.65) 1103.56,2683.9 ; pad.1@1088.73,2697.88 ccw(c1109.12,2704.65) 1103.56,2683.9 ; pad.1@1088.73,2697.88 ccw(c1109.12,2704.65) 1103.56,2683.9 ; 1101.21,2690 cw(c1101.21,2726.21) 1075.61,2700.61 ccw(c1101.21,2726.21) 1101.21,2690 ; 1101.21,2690 ccw(c1101.21,2653.79) 1075.61,2679.39 cw(c1101.21,2653.79) 1101.21,2690 ; 1104.93,2690 cw(c1104.93,2654.93) 1129.73,2679.73 ccw(c1104.93,2654.93) 1104.93,2690 ; 1104.93,2690 ccw(c1104.93,2725.07) 1129.73,2700.27 cw(c1104.93,2725.07) 1104.93,2690 ; P2.3@1125.36,2690 cw(c1125.36,2750.36) 1082.68,2707.68 ccw(c1125.36,2750.36) P2.3@1125.36,2690 ; P2.3@1125.36,2690 ccw(c1125.36,2629.64) 1082.68,2672.32 cw(c1125.36,2629.64) P2.3@1125.36,2690 ; 1164.8,2665.2 cw(c1189.6,2690) 1154.53,2690 ccw(c1189.6,2690) 1164.8,2665.2 ; 1164.8,2665.2 ccw(c1140,2640.4) 1140,2675.47 cw(c1140,2640.4) 1164.8,2665.2 ; 1181.87,2648.13 cw(c1223.74,2690) 1164.53,2690 ccw(c1223.74,2690) 1181.87,2648.13 ; 1181.87,2648.13 ccw(c1140,2606.26) 1140,2665.47 cw(c1140,2606.26) 1181.87,2648.13 ; 1415.78,2199.22 ccw(c1444.34,2227.78) 1448.99,2187.66 cw(c1444.34,2227.78) 1415.78,2199.22 ; 1415.78,2199.22 1436.06,2178.94 ; 1436.06,2178.94 cw(c1436.06,2172.27) 1442.08,2175.15 ccw(c1436.06,2172.27) 1436.06,2178.94 ; 1436.06,2178.94 ccw(c1436.06,2185.61) 1442.08,2182.73 cw(c1436.06,2185.61) 1436.06,2178.94 ; 1430.4,2184.6 ccw(c1447.38,2201.57) 1450.14,2177.72 cw(c1447.38,2201.57) 1430.4,2184.6
PC3: P2.4 pad.1@1055,2590 U2.11 | length 2261
  Top Layer w10: v2(1420,2160) 1433.89,2160 ; U2.11@1479.84,2128.04 1453.73,2154.16 1439.74,2154.16 ; 1433.89,2160 cw(c1433.89,2170.76) 1425.38,2164.17 ccw(c1433.89,2170.76) 1433.89,2160 ; 1433.89,2160 ccw(c1433.89,2149.24) 1425.38,2155.83 cw(c1433.89,2149.24) 1433.89,2160 ; 1433.89,2160 1439.74,2154.16 ; 1439.74,2154.16 ccw(c1431.72,2146.14) 1424.4,2154.8 cw(c1431.72,2146.14) 1439.74,2154.16 ; v2@1417.94,2162.44 cw(c1424.67,2154.47) 1432.05,2161.85 ccw(c1424.67,2154.47) v2@1417.94,2162.44
  Bottom Layer w10: pad.1@1055,2590 P2.4@1140,2590 1185,2545 1185,2242.63 1267.63,2160 v2(1420,2160) ; P2.4@1116.78,2582.1 ccw(c1095.78,2574.96) 1101.52,2596.39 ccw(c1105.72,2612.07) P2.4@1119.38,2603.28 ; P2.4@1116.78,2597.9 cw(c1095.78,2605.04) 1101.52,2583.61 cw(c1105.72,2567.93) P2.4@1119.38,2576.72 ; P2.4@1134.64,2588.9 ccw(c1172.3,2596.61) 1162.35,2559.48 ; P2.4@1141.1,2595.36 cw(c1133.39,2557.7) 1170.52,2567.65 ; pad.1@1080.79,2590 cw(c1080.79,2530.79) 1122.66,2572.66 ccw(c1080.79,2530.79) pad.1@1080.79,2590 ; pad.1@1080.79,2590 ccw(c1080.79,2649.21) 1122.66,2607.34 cw(c1080.79,2649.21) pad.1@1080.79,2590 ; pad.1@1086.36,2577.01 cw(c1099.56,2568.97) 1103.56,2583.9 ; pad.1@1086.36,2577.01 cw(c1099.56,2568.97) 1103.56,2583.9 ; pad.1@1086.36,2577.01 cw(c1099.56,2568.97) 1103.56,2583.9 ; pad.1@1086.36,2602.99 ccw(c1099.56,2611.03) 1103.56,2596.1 ; pad.1@1086.36,2602.99 ccw(c1099.56,2611.03) 1103.56,2596.1 ; pad.1@1086.36,2602.99 ccw(c1099.56,2611.03) 1103.56,2596.1 ; pad.1@1088.73,2582.12 cw(c1109.12,2575.35) 1103.56,2596.1 ; pad.1@1088.73,2582.12 cw(c1109.12,2575.35) 1103.56,2596.1 ; pad.1@1088.73,2582.12 cw(c1109.12,2575.35) 1103.56,2596.1 ; pad.1@1088.73,2597.88 ccw(c1109.12,2604.65) 1103.56,2583.9 ; pad.1@1088.73,2597.88 ccw(c1109.12,2604.65) 1103.56,2583.9 ; pad.1@1088.73,2597.88 ccw(c1109.12,2604.65) 1103.56,2583.9 ; 1101.21,2590 cw(c1101.21,2626.21) 1075.61,2600.61 ccw(c1101.21,2626.21) 1101.21,2590 ; 1101.21,2590 ccw(c1101.21,2553.79) 1075.61,2579.39 cw(c1101.21,2553.79) 1101.21,2590 ; 1104.93,2590 cw(c1104.93,2554.93) 1129.73,2579.73 ccw(c1104.93,2554.93) 1104.93,2590 ; 1104.93,2590 ccw(c1104.93,2625.07) 1129.73,2600.27 cw(c1104.93,2625.07) 1104.93,2590 ; P2.4@1125.36,2590 cw(c1125.36,2650.36) 1082.68,2607.68 ccw(c1125.36,2650.36) P2.4@1125.36,2590 ; P2.4@1125.36,2590 ccw(c1125.36,2529.64) 1082.68,2572.32 cw(c1125.36,2529.64) P2.4@1125.36,2590 ; 1164.8,2565.2 cw(c1189.6,2590) 1154.53,2590 ccw(c1189.6,2590) 1164.8,2565.2 ; 1164.8,2565.2 ccw(c1140,2540.4) 1140,2575.47 cw(c1140,2540.4) 1164.8,2565.2 ; 1181.87,2548.13 cw(c1223.74,2590) 1164.53,2590 ccw(c1223.74,2590) 1181.87,2548.13 ; 1181.87,2548.13 ccw(c1140,2506.26) 1140,2565.47 cw(c1140,2506.26) 1181.87,2548.13 ; 1403.56,2160 cw(c1403.56,2143.56) 1415.18,2155.18 ccw(c1403.56,2143.56) 1403.56,2160 ; 1403.56,2160 ccw(c1403.56,2176.44) 1415.18,2164.82 cw(c1403.56,2176.44) 1403.56,2160
PC4: P2.5 pad.1@1055,2490 U2.24 | length 2669.4
  Top Layer w10: P2.5@1134.64,2488.9 ccw(c1172.3,2496.61) 1162.35,2459.48 ; P2.5@1140,2490 1201,2429 1201,1939 1235,1905 v1(1235,1835) ; P2.5@1141.1,2495.36 cw(c1133.39,2457.7) 1170.52,2467.65 ; v2(1470,1800) 1505.73,1835.73 U2.24@1507.68,1835.73 ; 1164.8,2465.2 cw(c1189.6,2490) 1154.53,2490 ccw(c1189.6,2490) 1164.8,2465.2 ; 1164.8,2465.2 ccw(c1140,2440.4) 1140,2475.47 cw(c1140,2440.4) 1164.8,2465.2 ; 1181.87,2448.13 cw(c1223.74,2490) 1164.53,2490 ccw(c1223.74,2490) 1181.87,2448.13 ; 1181.87,2448.13 ccw(c1140,2406.26) 1140,2465.47 cw(c1140,2406.26) 1181.87,2448.13 ; 1235,1856.2 cw(c1213.8,1856.2) 1228.79,1841.21 ccw(c1213.8,1856.2) 1235,1856.2 ; 1235,1856.2 ccw(c1256.2,1856.2) 1241.21,1841.21 cw(c1256.2,1856.2) 1235,1856.2 ; 1481.63,1811.63 cw(c1470,1823.25) 1470,1806.81 ccw(c1470,1823.25) 1481.63,1811.63 ; 1481.63,1811.63 ccw(c1493.25,1800) 1476.81,1800 cw(c1493.25,1800) 1481.63,1811.63
  Bottom Layer w10: pad.1@1055,2490 P2.5@1140,2490 1145,2485 P2.5@1145,2470 ; P2.5@1116.78,2482.1 ccw(c1095.78,2474.96) 1101.52,2496.39 ccw(c1105.72,2512.07) P2.5@1119.38,2503.28 ; P2.5@1116.78,2497.9 cw(c1095.78,2505.04) 1101.52,2483.61 cw(c1105.72,2467.93) P2.5@1119.38,2476.72 ; v1(1235,1835) 1275,1795 1465,1795 v2(1470,1800) ; 1453.45,1798.04 cw(c1457.77,1790.56) v2@1464.61,1795.84 ; pad.1@1080.79,2490 cw(c1080.79,2430.79) 1122.66,2472.66 ccw(c1080.79,2430.79) pad.1@1080.79,2490 ; pad.1@1080.79,2490 ccw(c1080.79,2549.21) 1122.66,2507.34 cw(c1080.79,2549.21) pad.1@1080.79,2490 ; pad.1@1086.36,2477.01 cw(c1099.56,2468.97) 1103.56,2483.9 ; pad.1@1086.36,2477.01 cw(c1099.56,2468.97) 1103.56,2483.9 ; pad.1@1086.36,2477.01 cw(c1099.56,2468.97) 1103.56,2483.9 ; pad.1@1086.36,2502.99 ccw(c1099.56,2511.03) 1103.56,2496.1 ; pad.1@1086.36,2502.99 ccw(c1099.56,2511.03) 1103.56,2496.1 ; pad.1@1086.36,2502.99 ccw(c1099.56,2511.03) 1103.56,2496.1 ; pad.1@1088.73,2482.12 cw(c1109.12,2475.35) 1103.56,2496.1 ; pad.1@1088.73,2482.12 cw(c1109.12,2475.35) 1103.56,2496.1 ; pad.1@1088.73,2482.12 cw(c1109.12,2475.35) 1103.56,2496.1 ; pad.1@1088.73,2497.88 ccw(c1109.12,2504.65) 1103.56,2483.9 ; pad.1@1088.73,2497.88 ccw(c1109.12,2504.65) 1103.56,2483.9 ; pad.1@1088.73,2497.88 ccw(c1109.12,2504.65) 1103.56,2483.9 ; 1101.21,2490 cw(c1101.21,2526.21) 1075.61,2500.61 ccw(c1101.21,2526.21) 1101.21,2490 ; 1101.21,2490 ccw(c1101.21,2453.79) 1075.61,2479.39 cw(c1101.21,2453.79) 1101.21,2490 ; 1104.93,2490 cw(c1104.93,2454.93) 1129.73,2479.73 ccw(c1104.93,2454.93) 1104.93,2490 ; 1104.93,2490 ccw(c1104.93,2525.07) 1129.73,2500.27 cw(c1104.93,2525.07) 1104.93,2490 ; P2.5@1125.36,2490 cw(c1125.36,2550.36) 1082.68,2507.68 ccw(c1125.36,2550.36) P2.5@1125.36,2490 ; P2.5@1125.36,2490 ccw(c1125.36,2429.64) 1082.68,2472.32 cw(c1125.36,2429.64) P2.5@1125.36,2490 ; 1249.99,1820.01 cw(c1264.98,1835) 1243.78,1835 ccw(c1264.98,1835) 1249.99,1820.01 ; 1249.99,1820.01 ccw(c1235,1805.02) 1235,1826.22 cw(c1235,1805.02) 1249.99,1820.01 ; 1441.49,1795 ccw(c1441.49,1828.51) 1465.18,1804.82 cw(c1441.49,1828.51) 1441.49,1795
PC5: P2.6 pad.1@1055,2390 U2.25 | length 2761.9
  Top Layer w10: P2.6@1134.64,2388.9 ccw(c1172.3,2396.61) 1162.35,2359.48 ; P2.6@1140,2390 1185,2345 1185,1867.63 1201,1851.63 1201,1804 1240,1765 ; P2.6@1141.1,2395.36 cw(c1133.39,2357.7) 1170.52,2367.65 ; 1240.27,1777.73 cw(c1233.53,1752.61) v1@1256.06,1765.61 ; v1@1246.79,1761.88 ccw(c1237.87,1758.48) 1240.34,1767.71 ccw(c1242.23,1774.75) v1@1248.02,1770.33 ; v1(1255,1765) 1240,1765 ; v1@1450,1765 1469.45,1765 ; U2.25@1521.6,1821.81 1500,1800.21 1500,1795.55 1469.45,1765 ; 1164.8,2365.2 cw(c1189.6,2390) 1154.53,2390 ccw(c1189.6,2390) 1164.8,2365.2 ; 1164.8,2365.2 ccw(c1140,2340.4) 1140,2375.47 cw(c1140,2340.4) 1164.8,2365.2 ; 1181.87,2348.13 cw(c1223.74,2390) 1164.53,2390 ccw(c1223.74,2390) 1181.87,2348.13 ; 1181.87,2348.13 ccw(c1140,2306.26) 1140,2365.47 cw(c1140,2306.26) 1181.87,2348.13 ; 1240,1765 cw(c1240,1756.58) 1247.34,1760.7 ccw(c1240,1756.58) 1240,1765 ; 1240,1765 ccw(c1240,1773.42) 1247.34,1769.3 cw(c1240,1773.42) 1240,1765 ; 1469.45,1765 cw(c1469.45,1779.15) 1457.45,1771.65 ccw(c1469.45,1779.15) 1469.45,1765 ; 1214.41,1790.59 ccw(c1255,1831.19) 1255,1773.78 cw(c1255,1831.19) 1214.41,1790.59 ; 1231.48,1773.52 ccw(c1255,1797.05) 1255,1763.78 cw(c1255,1797.05) 1231.48,1773.52 ; v1@1456.21,1760.79 cw(c1466.37,1750.63) 1466.37,1765 ccw(c1466.37,1750.63) v1@1456.21,1760.79
  Bottom Layer w10: pad.1@1055,2390 P2.6@1140,2390 ; P2.6@1116.78,2382.1 ccw(c1095.78,2374.96) 1101.52,2396.39 ccw(c1105.72,2412.07) P2.6@1119.38,2403.28 ; P2.6@1116.78,2397.9 cw(c1095.78,2405.04) 1101.52,2383.61 cw(c1105.72,2367.93) P2.6@1119.38,2376.72 ; v1(1255,1765) v1@1440,1765 ; pad.1@1080.79,2390 cw(c1080.79,2330.79) 1122.66,2372.66 ccw(c1080.79,2330.79) pad.1@1080.79,2390 ; pad.1@1080.79,2390 ccw(c1080.79,2449.21) 1122.66,2407.34 cw(c1080.79,2449.21) pad.1@1080.79,2390 ; pad.1@1086.36,2377.01 cw(c1099.56,2368.97) 1103.56,2383.9 ; pad.1@1086.36,2377.01 cw(c1099.56,2368.97) 1103.56,2383.9 ; pad.1@1086.36,2377.01 cw(c1099.56,2368.97) 1103.56,2383.9 ; pad.1@1086.36,2402.99 ccw(c1099.56,2411.03) 1103.56,2396.1 ; pad.1@1086.36,2402.99 ccw(c1099.56,2411.03) 1103.56,2396.1 ; pad.1@1086.36,2402.99 ccw(c1099.56,2411.03) 1103.56,2396.1 ; pad.1@1088.73,2382.12 cw(c1109.12,2375.35) 1103.56,2396.1 ; pad.1@1088.73,2382.12 cw(c1109.12,2375.35) 1103.56,2396.1 ; pad.1@1088.73,2382.12 cw(c1109.12,2375.35) 1103.56,2396.1 ; pad.1@1088.73,2397.88 ccw(c1109.12,2404.65) 1103.56,2383.9 ; pad.1@1088.73,2397.88 ccw(c1109.12,2404.65) 1103.56,2383.9 ; pad.1@1088.73,2397.88 ccw(c1109.12,2404.65) 1103.56,2383.9 ; 1101.21,2390 cw(c1101.21,2426.21) 1075.61,2400.61 ccw(c1101.21,2426.21) 1101.21,2390 ; 1101.21,2390 ccw(c1101.21,2353.79) 1075.61,2379.39 cw(c1101.21,2353.79) 1101.21,2390 ; 1104.93,2390 cw(c1104.93,2354.93) 1129.73,2379.73 ccw(c1104.93,2354.93) 1104.93,2390 ; 1104.93,2390 ccw(c1104.93,2425.07) 1129.73,2400.27 cw(c1104.93,2425.07) 1104.93,2390 ; P2.6@1125.36,2390 cw(c1125.36,2450.36) 1082.68,2407.68 ccw(c1125.36,2450.36) P2.6@1125.36,2390 ; P2.6@1125.36,2390 ccw(c1125.36,2329.64) 1082.68,2372.32 cw(c1125.36,2329.64) P2.6@1125.36,2390 ; 1276.2,1765 cw(c1276.2,1786.2) 1261.21,1771.21 ccw(c1276.2,1786.2) 1276.2,1765 ; 1276.2,1765 ccw(c1276.2,1743.8) 1261.21,1758.79 cw(c1276.2,1743.8) 1276.2,1765 ; 1423.98,1765 ccw(c1423.98,1793.02) 1443.79,1773.21 cw(c1423.98,1793.02) 1423.98,1765 ; 1433.63,1765 cw(c1433.63,1750.63) 1443.79,1760.79 ccw(c1433.63,1750.63) 1433.63,1765
  other v1: 1450,1767
PC6: P1.4 pad.1@2225,1990 U2.37 | length 1805.9
  Top Layer w10: U2.37@1799.99,1780.06 1828,1752.05 1828,1722 v1(1850,1700) ; 1838.77,1709.15 ccw(c1852.64,1712.87) v1@1849.76,1698.8 ; 1840.85,1711.23 cw(c1837.13,1697.36) v1@1851.2,1700.24 ; 1835.01,1714.99 cw(c1820.02,1700) 1841.22,1700 ccw(c1820.02,1700) 1835.01,1714.99 ; 1835.01,1714.99 ccw(c1850,1729.98) 1850,1708.78 cw(c1850,1729.98) 1835.01,1714.99
  Bottom Layer w10: v1(1850,1700) 1883.22,1733.18 1883.22,1753.03 1910,1779.81 1910,1800.22 2099.78,1990 ; P1.4@2160.62,1976.72 cw(c2174.28,1967.93) 2178.48,1983.61 cw(c2184.22,2005.04) P1.4@2163.22,1997.9 ; P1.4@2160.62,2003.28 ccw(c2174.28,2012.07) 2178.48,1996.39 ccw(c2184.22,1974.96) P1.4@2163.22,1982.1 ; pad.1@2225,1990 P1.4@2140,1990 2099.78,1990 ; 2099.78,1990 cw(c2099.78,1969.28) 2118.19,1978.77 ccw(c2099.78,1969.28) 2099.78,1990 ; 2099.78,1990 ccw(c2099.78,2010.72) 2118.19,2001.23 cw(c2099.78,2010.72) 2099.78,1990 ; P1.4@2154.64,1990 cw(c2154.64,1929.64) 2197.32,1972.32 ccw(c2154.64,1929.64) P1.4@2154.64,1990 ; P1.4@2154.64,1990 ccw(c2154.64,2050.36) 2197.32,2007.68 cw(c2154.64,2050.36) P1.4@2154.64,1990 ; 2175.07,1990 cw(c2175.07,2025.07) 2150.27,2000.27 ccw(c2175.07,2025.07) 2175.07,1990 ; 2175.07,1990 ccw(c2175.07,1954.93) 2150.27,1979.73 cw(c2175.07,1954.93) 2175.07,1990 ; 2176.44,1983.9 cw(c2180.44,1968.97) pad.1@2193.64,1977.01 ; 2176.44,1983.9 ccw(c2170.88,2004.65) pad.1@2191.27,1997.88 ; 2176.44,1983.9 ccw(c2170.88,2004.65) pad.1@2191.27,1997.88 ; 2176.44,1983.9 cw(c2180.44,1968.97) pad.1@2193.64,1977.01 ; 2176.44,1983.9 ccw(c2170.88,2004.65) pad.1@2191.27,1997.88 ; 2176.44,1983.9 cw(c2180.44,1968.97) pad.1@2193.64,1977.01 ; 2176.44,1996.1 cw(c2170.88,1975.35) pad.1@2191.27,1982.12 ; 2176.44,1996.1 ccw(c2180.44,2011.03) pad.1@2193.64,2002.99 ; 2176.44,1996.1 ccw(c2180.44,2011.03) pad.1@2193.64,2002.99 ; 2176.44,1996.1 cw(c2170.88,1975.35) pad.1@2191.27,1982.12 ; 2176.44,1996.1 ccw(c2180.44,2011.03) pad.1@2193.64,2002.99 ; 2176.44,1996.1 cw(c2170.88,1975.35) pad.1@2191.27,1982.12 ; 2178.79,1990 cw(c2178.79,1953.79) 2204.39,1979.39 ccw(c2178.79,1953.79) 2178.79,1990 ; 2178.79,1990 ccw(c2178.79,2026.21) 2204.39,2000.61 cw(c2178.79,2026.21) 2178.79,1990 ; pad.1@2199.21,1990 cw(c2199.21,2049.21) 2157.34,2007.34 ccw(c2199.21,2049.21) pad.1@2199.21,1990 ; pad.1@2199.21,1990 ccw(c2199.21,1930.79) 2157.34,1972.66 cw(c2199.21,1930.79) pad.1@2199.21,1990 ; v1@1850,1708.78 ccw(c1850,1730.08) 1865.06,1715.02 cw(c1850,1730.08) v1@1850,1708.78 ; v1@1858.78,1700 cw(c1879.87,1700) 1864.96,1714.91 ccw(c1879.87,1700) v1@1858.78,1700
PC7: P1.5 pad.1@2225,2090 U2.38 | length 2172.8
  Top Layer w10: v1(1785,1835) 1785,1822.88 U2.38@1813.91,1793.98 ; v1@2018.8,2030.24 cw(c2032.87,2027.36) 2029.15,2041.23 ; v1(2020,2030) 2035,2045 ; v1@2020.24,2028.8 ccw(c2017.36,2042.87) 2031.23,2039.15 ; 2109.48,2067.65 cw(c2146.61,2057.7) P1.5@2138.9,2095.36 ; 2117.65,2059.48 ccw(c2107.7,2096.61) P1.5@2145.36,2088.9 ; P1.5@2140,2090 2092.5,2042.5 2090,2045 2035,2045 ; 2034.99,2044.99 cw(c2020,2059.98) 2020,2038.78 ccw(c2020,2059.98) 2034.99,2044.99 ; 2034.99,2044.99 ccw(c2049.98,2030) 2028.78,2030 cw(c2049.98,2030) 2034.99,2044.99 ; 2098.13,2048.13 cw(c2140,2006.26) 2140,2065.47 ccw(c2140,2006.26) 2098.13,2048.13 ; 2098.13,2048.13 ccw(c2056.26,2090) 2115.47,2090 cw(c2056.26,2090) 2098.13,2048.13 ; 2115.2,2065.2 cw(c2140,2040.4) 2140,2075.47 ccw(c2140,2040.4) 2115.2,2065.2 ; 2115.2,2065.2 ccw(c2090.4,2090) 2125.47,2090 cw(c2090.4,2090) 2115.2,2065.2
  Bottom Layer w10: v1(1785,1835) 1873.79,1835 1990,1951.21 1990,2000 v1(2020,2030) ; P1.5@2140,2090 pad.1@2225,2090 ; P1.5@2160.62,2076.72 cw(c2174.28,2067.93) 2178.48,2083.61 cw(c2184.22,2105.04) P1.5@2163.22,2097.9 ; P1.5@2160.62,2103.28 ccw(c2174.28,2112.07) 2178.48,2096.39 ccw(c2184.22,2074.96) P1.5@2163.22,2082.1 ; 1806.2,1835 cw(c1806.2,1856.2) 1791.21,1841.21 ccw(c1806.2,1856.2) 1806.2,1835 ; 1806.2,1835 ccw(c1806.2,1813.8) 1791.21,1828.79 cw(c1806.2,1813.8) 1806.2,1835 ; 2005.01,2015.01 cw(c2020,2000.02) 2020,2021.22 ccw(c2020,2000.02) 2005.01,2015.01 ; 2005.01,2015.01 ccw(c1990.02,2030) 2011.22,2030 cw(c1990.02,2030) 2005.01,2015.01 ; P1.5@2154.64,2090 cw(c2154.64,2029.64) 2197.32,2072.32 ccw(c2154.64,2029.64) P1.5@2154.64,2090 ; P1.5@2154.64,2090 ccw(c2154.64,2150.36) 2197.32,2107.68 cw(c2154.64,2150.36) P1.5@2154.64,2090 ; 2175.07,2090 cw(c2175.07,2125.07) 2150.27,2100.27 ccw(c2175.07,2125.07) 2175.07,2090 ; 2175.07,2090 ccw(c2175.07,2054.93) 2150.27,2079.73 cw(c2175.07,2054.93) 2175.07,2090 ; 2176.44,2083.9 cw(c2180.44,2068.97) pad.1@2193.64,2077.01 ; 2176.44,2083.9 ccw(c2170.88,2104.65) pad.1@2191.27,2097.88 ; 2176.44,2083.9 ccw(c2170.88,2104.65) pad.1@2191.27,2097.88 ; 2176.44,2083.9 cw(c2180.44,2068.97) pad.1@2193.64,2077.01 ; 2176.44,2083.9 ccw(c2170.88,2104.65) pad.1@2191.27,2097.88 ; 2176.44,2083.9 cw(c2180.44,2068.97) pad.1@2193.64,2077.01 ; 2176.44,2096.1 cw(c2170.88,2075.35) pad.1@2191.27,2082.12 ; 2176.44,2096.1 ccw(c2180.44,2111.03) pad.1@2193.64,2102.99 ; 2176.44,2096.1 ccw(c2180.44,2111.03) pad.1@2193.64,2102.99 ; 2176.44,2096.1 cw(c2170.88,2075.35) pad.1@2191.27,2082.12 ; 2176.44,2096.1 ccw(c2180.44,2111.03) pad.1@2193.64,2102.99 ; 2176.44,2096.1 cw(c2170.88,2075.35) pad.1@2191.27,2082.12 ; 2178.79,2090 cw(c2178.79,2053.79) 2204.39,2079.39 ccw(c2178.79,2053.79) 2178.79,2090 ; 2178.79,2090 ccw(c2178.79,2126.21) 2204.39,2100.61 cw(c2178.79,2126.21) 2178.79,2090 ; pad.1@2199.21,2090 cw(c2199.21,2149.21) 2157.34,2107.34 ccw(c2199.21,2149.21) pad.1@2199.21,2090 ; pad.1@2199.21,2090 ccw(c2199.21,2030.79) 2157.34,2072.66 cw(c2199.21,2030.79) pad.1@2199.21,2090